# Altium PCB DC-DC SY8029AIC - PCB.PcbDoc
Units mil, origin at the board's own origin, x right, y up, seen from the top; angles counter-clockwise.
Board outline not stored, 2 copper layers (Top Layer, Bottom Layer); 12 components, 0 nets, 30 pads, 0 vias.
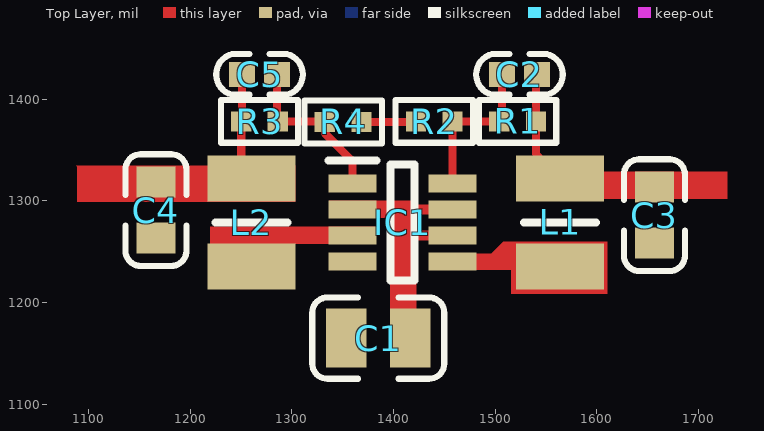
[diagram p0: Top Layer view]
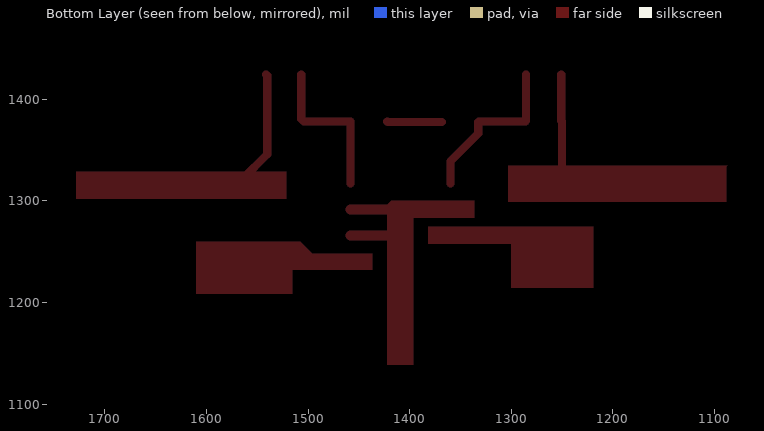
[diagram p1: Bottom Layer view, seen from below]

## Layer stack, top to bottom
Top Solder: solder mask 0.4, Solder Resist, Dk 3.5
Top Layer: signal copper 1.4
Dielectric 1: dielectric 12.6, FR-4, Dk 4.8
Bottom Layer: signal copper 1.4
Bottom Solder: solder mask 0.4, Solder Resist, Dk 3.5

## Components (designator, comment, footprint, x,y, rotation, side; value= is the part's Value field where it differs from the comment)
C1 "10uF 10V" 0805C 1385,1165 r180 top
C2 "22pF 50V" 0402C 1524.01,1424.56 r0 top
C3 "22uF 6.3V" 0603C 1656.87,1286.05 r90 top
C4 "22uF 6.3V" 0603C 1166.24,1291.01 r90 top
C5 "22pF 50V" 0402C 1268.14,1424.56 r180 top
IC1 "SY8029AIC" SOT65P280X110-8N 1408.93,1278.89 r0 top
L1 "MLP2520K1R0MT0S1" INDC2520X100N 1564.01,1278.89 r90 top
L2 "MLP2520K1R0MT0S1" INDC2520X100N 1260.04,1278.89 r270 top
R1 "100k" 0402R 1522.2,1378.3 r0 top
R2 "49.9k" 0402R 1440.14,1378.3 r0 top
R3 "100k" 0402R 1268.14,1378.3 r180 top
R4 "22.2k" 0402R 1350.5,1377.73 r180 top

## Footprints (in the part's own frame and the unit in brackets; to place one, negate y for a bottom-side part, rotate by r counter-clockwise, add the part's x,y. Pads: shape width x height; smd on the part's side, far side on the other; paste and mask are expansions set on the pad)
0402C [mm]
  rect 0.65x0.62 smd: 1(-0.44,0) 2(0.44,0)
  silkscreen extent -1.08,-0.51 1.08,0.51, body extent -0.51,-0.25 0.49,0.25, height 0.55
0402R [mil]
  rect 20x20 smd: 1(-18,0) 2(18,0)
  silkscreen extent -38,-21 38,21, body extent -20,-11 20,11, height 16
0603C [mm]
  rect 0.78x0.98 smd: 1(-0.7,0) 2(0.7,0)
  silkscreen extent -1.4,-0.76 1.4,0.76, body extent -0.8,-0.4 0.8,0.4, height 0.87
0805C [mm]
  rect 1.02x1.47 smd: 1(-0.8,0) 2(0.8,0)
  silkscreen extent -1.65,-1.02 1.65,1.02, body extent -1,-0.62 1,0.63, height 0.88
INDC2520X100N [mm]
  rect 1.15x2.2 smd: 1(-1.1,0) 2(1.1,0)
  silkscreen extent 0,-0.9 0,0.9, body extent -1.25,-1 1.25,1, height 1
SOT65P280X110-8N [mm]
  rect 1.2x0.45 smd: 1(-1.25,0.975) 2(-1.25,0.325) 3(-1.25,-0.325) 4(-1.25,-0.975) 5(1.25,-0.975) 6(1.25,-0.325) 7(1.25,0.325) 8(1.25,0.975)
  silkscreen extent -1.85,-1.45 0.3,1.55, body extent -1.4,-1.45 1.4,1.45, height 1.1

## Part data
C1 C2 C3 C4 C5: library part CAP-NP
IC1: "Integrated Circuit", Manufacturer_Name="Silergy Corp", Datasheet Link=https://datasheet.lcsc.com/szlcsc/Silergy-Corp-SY8029AIC_C207636.pdf, Height=1.1mm, Manufacturer_Part_Number=SY8029AIC
L1: "Inductor", Manufacturer_Name=TDK, Mouser Part Number=810-MLP2520K1R0MT0S1, Supplier Part Number 1=445-15738-1-ND, Arrow Part Number=MLP2520K1R0MT0S1, Arrow Price/Stock=https://www.arrow.com/en/products/mlp2520k1r0mt0s1/tdk, Datasheet Link=https://www.arrow.com/en/products/mlp2520k1r0mt0s1/tdk, Height=1mm, Manufacturer_Part_Number=MLP2520K1R0MT0S1, Mouser Price/Stock=https://www.mouser.com/Search/Refine.aspx?Keyword=810-MLP2520K1R0MT0S1, Supplier 1=Digi-Key
L2: "Inductor", Manufacturer_Name=TDK, Mouser Part Number=810-MLP2520K1R0MT0S1, Arrow Part Number=MLP2520K1R0MT0S1, Arrow Price/Stock=https://www.arrow.com/en/products/mlp2520k1r0mt0s1/tdk, Datasheet Link=https://www.arrow.com/en/products/mlp2520k1r0mt0s1/tdk, Height=1mm, Manufacturer_Part_Number=MLP2520K1R0MT0S1, Mouser Price/Stock=https://www.mouser.com/Search/Refine.aspx?Keyword=810-MLP2520K1R0MT0S1
R1 R2 R3 R4: library part RES

## Nets (pads, with @x,y where several pads share a name; then routed paths per layer and width w, separated by ;. In a path a pad name is that pad's centre, name@x,y a point inside that pad or via, vN(x,y) a via of type N, cw(c..) or ccw(c..) an arc to the next point about the centre after c; other vN are vias at no path point)
pads on no net: C1.1 C1.2 C2.1 C2.2 C3.1 C3.2 C4.1 C4.2 C5.1 C5.2 IC1.1 IC1.2 IC1.3 IC1.4 IC1.5 IC1.6 IC1.7 IC1.8 L1.1 L1.2 L2.1 L2.2 R1.1 R1.2 R2.1 R2.2 R3.1 R3.2 R4.1 R4.2
copper on no net: | length 683.6
  Top Layer w8: 1250.82,1424.56 1250.82,1378.97 1250.14,1378.3 1250.14,1332.09 1260.04,1322.19 ; 1285.46,1424.56 1285.46,1378.97 1286.14,1378.3 1331.94,1378.3 1332.5,1377.73 1332.5,1366.32 1359.72,1339.1 1359.72,1317.27 ; 1368.5,1377.73 1421.58,1377.73 1422.14,1378.3 ; 1458.14,1317.27 1458.14,1378.3 1504.2,1378.3 1506.69,1380.78 1506.69,1424.56 ; 1541.33,1424.56 1540.2,1423.43 1540.2,1378.3 1540.2,1346 1564.01,1322.19
  Top Layer w10: 1413.39,1264.76 1414.71,1266.09 1458.14,1266.09 ; 1413.39,1289.37 1415.7,1291.68 1458.14,1291.68

## Other copper
Top Layer:
  region: 1303.15,1299.21 1088.58,1299.21 1088.58,1333.66 1087.6,1334.65 1303.15,1334.65
  region: 1437.01,1248.03 1437.01,1232.28 1515.75,1232.28 1515.75,1208.66 1610.24,1208.66 1610.24,1259.84 1507.87,1259.84 1496.06,1248.03
  region: 1336.61,1300.2 1418.31,1300.2 1422.24,1296.26 1422.24,1138.78 1396.65,1138.78 1396.65,1283.46 1336.61,1283.46
  region: 1381.89,1274.61 1381.89,1257.87 1300.2,1257.87 1300.2,1214.57 1219.49,1214.57 1219.49,1274.61
  region: 1521.65,1328.74 1728.35,1328.74 1728.35,1302.17 1522.64,1302.17 1521.65,1302.17